# EAGLE board RaterPhonicAllTogether_production_NoGraph (EAGLE 5.10)
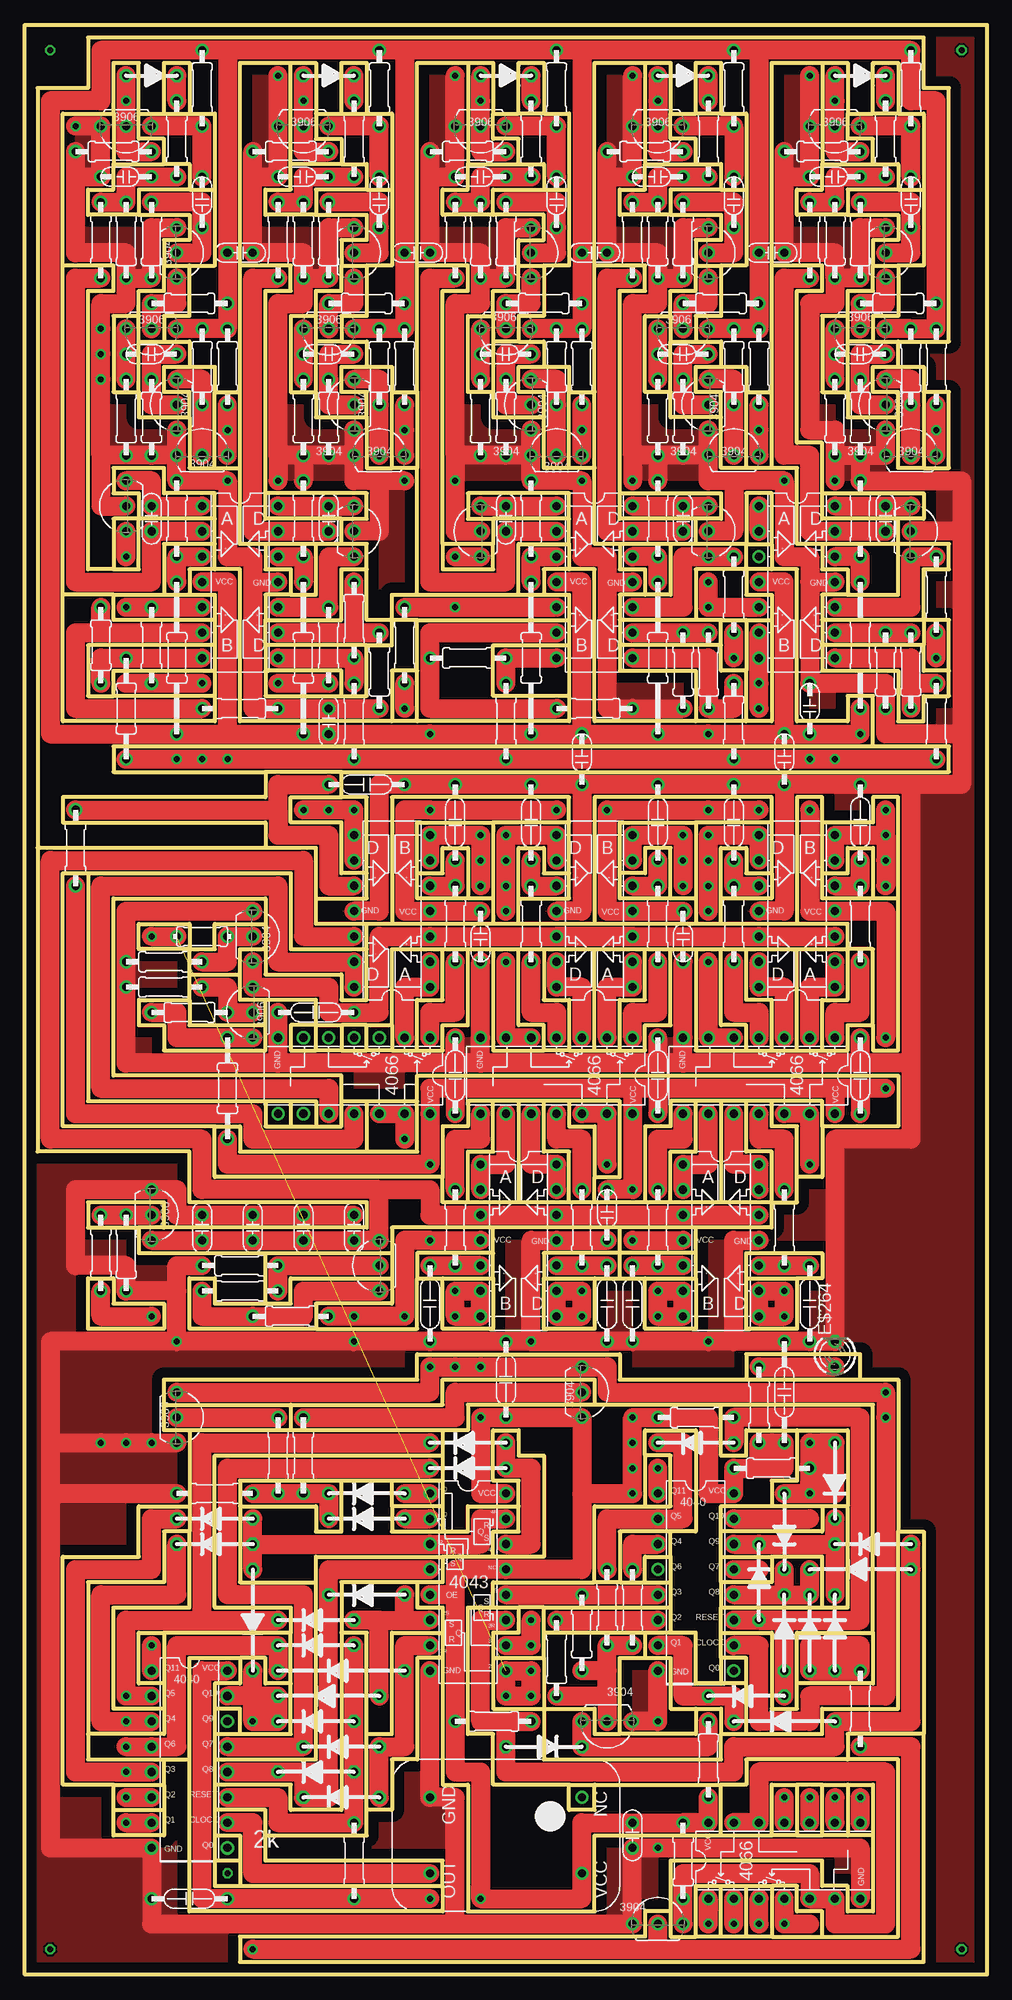
[diagram p0: board, top side]
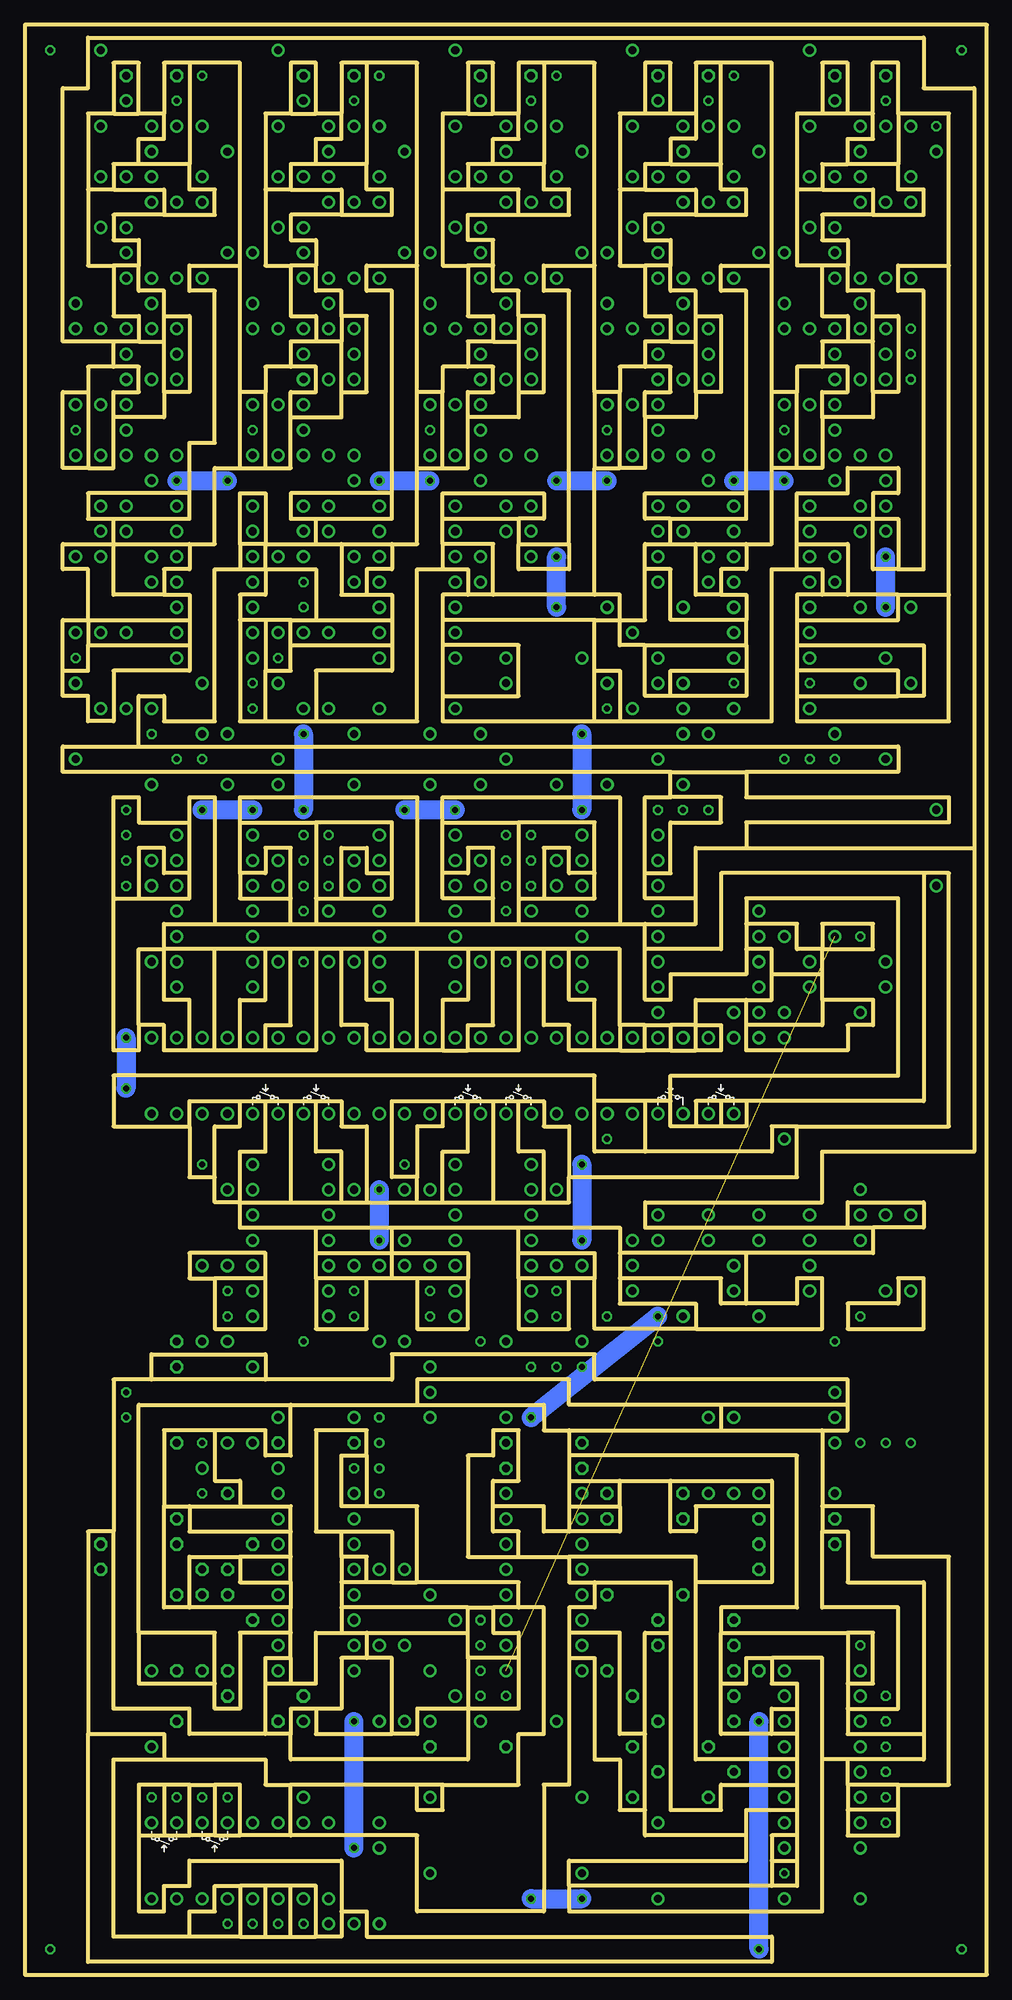
[diagram p1: board, bottom side, seen from below]

Size 96.52 x 195.58 mm. Coordinates in mm from the lower left corner, seen from the top.
Outline: 1250 segments
Copper layers (1*16): Top 0.035mm / dielectric 1.5mm / Bottom 0.035mm
Design rules "default": minimum track width 10mil, minimum drill 24mil, track to track 8mil, track to pad 8mil, pad to pad 8mil, via to via 8mil, smd to smd 8mil, copper to edge 40mil, drill to drill 8mil, minimum pad ring 10mil, minimum via ring 8mil, stop-mask expansion 4mil, vias tented up to drill 0mil, thermal gap 10mil
Milling: 1 lines

## Footprints (pad centres in the part's own frame; a part is rotated, then mirrored left to right if it is on the bottom)
4043-SR-LATCH = drill 0.813 round: 1!R -3.81,1.27; 1!S -3.81,3.81; 1Q 3.81,1.27; 2!R -3.81,-3.81; 2!S -3.81,-6.35; 2Q 3.81,-8.89; 3!R 3.81,-1.27; 3!S 3.81,-3.81; 3Q 3.81,-6.35; 4!R 3.81,3.81; 4!S 3.81,6.35; 4Q -3.81,8.89; GND -3.81,-8.89; NC -3.81,6.35; OE -3.81,-1.27; VCC 3.81,8.89
RESISTOR = drill 0.813 round: IN1 -3.81,0; IN2 3.81,0
TRANSISTOR = drill 0.8 round: P$1 0,0; P$2 2.54,0; P$3 -2.54,0
404-BIN-COUNT = drill 0.813 round: CLOCK 3.81,-7.62; GND -3.81,-10.16; Q0 3.81,-10.16; Q1 -3.81,-7.62; Q2 -3.81,-5.08; Q3 -3.81,-2.54; Q4 -3.81,2.54; Q5 -3.81,5.08; Q6 -3.81,0; Q7 3.81,0; Q8 3.81,-2.54; Q9 3.81,2.54; Q10 3.81,5.08; Q11 -3.81,7.62; RESET 3.81,-5.08; VCC 3.81,7.62
DIODE-M1 = drill 0.8 octagon: P$1 -2.54,0; P$2 2.54,0
711A-XTAL = drill 0.813 round: GND -3.81,-8.89; NC -3.81,6.35; OUT 3.81,-8.89; VCC 3.81,6.35
DIODE = drill 0.8 octagon: P$1 -3.81,0; P$2 3.81,0
SMALL-CAPACITOR = drill 0.813 round: IN1 0,0; IN2 5.08,0
LM324-QUAD-OPAMP = drill 0.813 round: AMINUS -3.81,5.08; AOUT -3.81,7.62; APLUS -3.81,2.54; BMINUS -3.81,-5.08; BOUT -3.81,-7.62; BPLUS -3.81,-2.54; CMINUS 3.81,5.08; COUT 3.81,7.62; CPLUS 3.81,2.54; DMINUS 3.81,-5.08; DOUT 3.81,-7.62; DPLUS 3.81,-2.54; GND 3.81,0; VCC -3.81,0
RESISTOR-L4 = drill 0.813 round: IN1 -7.62,0; IN2 7.62,0
CAPACITOR-S2 = drill 0.813 round: IN1 -1.27,0; IN2 1.27,0
RESISTOR-L2 = drill 0.813 round: IN1 -5.08,0; IN2 5.08,0
RESISTOR-L3 = drill 0.813 round: IN1 -6.35,0; IN2 6.35,0
4066-QUAD-SW = drill 0.813 round: A1 -3.81,7.62; A2 -3.81,2.54; A3 3.81,-5.08; A4 3.81,0; B1 -3.81,5.08; B2 -3.81,0; B3 3.81,-7.62; B4 3.81,-2.54; C1 3.81,5.08; C2 -3.81,-2.54; C3 -3.81,-5.08; C4 3.81,2.54; GND -3.81,-7.62; VCC 3.81,7.62
DIODE-L2 = drill 0.8 octagon: P$1 -5.08,0; P$2 5.08,0
CAPACITOR-L1 = drill 0.813 round: IN1 -5.08,0; IN2 5.08,0
CAPACITOR = drill 0.813 round: IN1 -2.54,0; IN2 5.08,0
DIODE-L3 = drill 0.8 octagon: P$1 -6.35,0; P$2 6.35,0
RESISTOR-S2 = drill 0.813 round: IN1 -2.54,0; IN2 2.54,0
LED3MM = drill 0.813 octagon: A -1.27,0; K 1.27,0

## Placement (x,y rotation side)
E$1  [4043-SR-LATCH]  44.45,39.37 0 top
E$2  2k  [RESISTOR]  27.94,146.05 270 top
E$3  [TRANSISTOR]  10.16,185.42 180 top
E$4  [404-BIN-COUNT]  16.51,22.86 0 top
E$5  [DIODE-M1]  12.7,190.5 0 top
E$6  [711A-XTAL]  49.53,13.97 270 top
E$7  [DIODE]  29.21,20.32 180 top
E$8  [DIODE]  29.21,33.02 180 top
E$9  910  [RESISTOR]  15.24,184.15 270 top
E$10  2.2uF  [SMALL-CAPACITOR]  12.7,180.34 180 top
E$11  [LM324-QUAD-OPAMP]  21.59,139.7 0 top
E$12  [DIODE]  31.75,17.78 180 top
E$13  [DIODE]  31.75,22.86 180 top
E$14  [DIODE]  29.21,35.56 180 top
E$15  100k  [RESISTOR]  10.16,173.99 90 top
E$16  100k  [RESISTOR]  7.62,173.99 270 top
E$17  [DIODE]  34.29,45.72 180 top
E$18  [TRANSISTOR]  27.94,185.42 180 top
E$19  [TRANSISTOR]  10.16,147.32 90 top
E$20  2k  [RESISTOR]  15.24,146.05 270 top
E$21  5K  [RESISTOR-L4]  27.94,132.08 90 top
E$22  [CAPACITOR-S2]  12.7,146.05 90 top
E$23  10k  [RESISTOR]  7.62,133.35 90 top
E$24  [DIODE]  34.29,48.26 180 top
E$25  [DIODE]  19.05,43.18 180 top
E$26  [DIODE]  19.05,45.72 180 top
E$27  [404-BIN-COUNT]  67.31,40.64 0 top
E$28  [DIODE]  76.2,34.29 90 top
E$29  1k  [RESISTOR]  21.59,127 0 top
E$30  [CAPACITOR-S2]  30.48,146.05 90 top
E$31  10K  [RESISTOR]  17.78,189.23 270 top
E$32  500Pf  [SMALL-CAPACITOR]  17.78,175.26 90 top
E$33  100K  [RESISTOR]  12.7,173.99 90 top
E$34  [TRANSISTOR]  15.24,172.72 270 top
E$35  2k  [RESISTOR]  16.51,167.64 0 top
E$36  [TRANSISTOR]  12.7,165.1 180 top
E$37  22Pf  [SMALL-CAPACITOR]  15.24,162.56 180 top
E$38  100k  [RESISTOR-L2]  10.16,127 90 top
E$39  [DIODE]  73.66,39.37 90 top
E$40  100k  [RESISTOR]  12.7,156.21 90 top
E$41  [DIODE]  72.39,27.94 180 top
E$42  [DIODE]  67.31,53.34 180 top
E$43  [TRANSISTOR]  15.24,157.48 90 top
E$44  2k  [RESISTOR]  17.78,161.29 90 top
E$45  [TRANSISTOR]  17.78,152.4 0 top
E$46  2k  [RESISTOR]  20.32,161.29 90 top
E$47  [CAPACITOR-S2]  48.26,146.05 90 top
E$48  [CAPACITOR-S2]  66.04,146.05 90 top
E$49  5K  [RESISTOR-L3]  83.82,133.35 90 top
E$50  [CAPACITOR-S2]  86.36,146.05 90 top
E$51  2K  [RESISTOR]  25.4,52.07 90 top
E$52  10k  [RESISTOR]  33.02,135.89 270 top
E$53  10k  [RESISTOR]  44.45,132.08 180 top
E$54  [TRANSISTOR]  33.02,144.78 270 top
E$55  [DIODE-M1]  30.48,190.5 0 top
E$56  910  [RESISTOR]  33.02,184.15 270 top
E$57  2.2uF  [SMALL-CAPACITOR]  30.48,180.34 180 top
E$58  100k  [RESISTOR]  27.94,173.99 90 top
E$59  100k  [RESISTOR]  25.4,173.99 270 top
E$60  10K  [RESISTOR]  35.56,189.23 270 top
E$61  500Pf  [SMALL-CAPACITOR]  35.56,175.26 90 top
E$62  100K  [RESISTOR]  30.48,173.99 90 top
E$63  [TRANSISTOR]  33.02,172.72 270 top
E$64  2k  [RESISTOR]  34.29,167.64 0 top
E$65  [TRANSISTOR]  30.48,165.1 180 top
E$66  100k  [RESISTOR]  30.48,156.21 90 top
E$67  [TRANSISTOR]  33.02,157.48 90 top
E$68  2k  [RESISTOR]  35.56,161.29 90 top
E$69  [TRANSISTOR]  35.56,152.4 0 top
E$70  2k  [RESISTOR]  38.1,161.29 90 top
E$71  2k  [RESISTOR]  27.94,156.21 270 top
E$72  22Pf  [SMALL-CAPACITOR]  33.02,162.56 180 top
E$73  [LM324-QUAD-OPAMP]  57.15,139.7 0 top
E$74  [TRANSISTOR]  45.72,185.42 180 top
E$75  2k  [RESISTOR]  10.16,156.21 270 top
E$76  4k  [RESISTOR]  8.89,182.88 0 top
E$77  [DIODE-M1]  48.26,190.5 0 top
E$78  910  [RESISTOR]  50.8,184.15 270 top
E$79  2.2uF  [SMALL-CAPACITOR]  48.26,180.34 180 top
E$80  100k  [RESISTOR]  45.72,173.99 90 top
E$81  100k  [RESISTOR]  43.18,173.99 270 top
E$82  2k  [RESISTOR]  50.8,146.05 90 top
E$83  5K  [RESISTOR-L4]  50.8,132.08 90 top
E$84  5K  [RESISTOR-L4]  63.5,132.08 90 top
E$85  5K  [RESISTOR-L4]  15.24,132.08 90 top
E$86  [TRANSISTOR]  45.72,144.78 90 top
E$87  [TRANSISTOR]  68.58,144.78 270 top
E$88  [TRANSISTOR]  88.9,144.78 270 top
E$89  10K  [RESISTOR]  53.34,189.23 270 top
E$90  500Pf  [SMALL-CAPACITOR]  53.34,175.26 90 top
E$91  100K  [RESISTOR]  48.26,173.99 90 top
E$92  [TRANSISTOR]  50.8,172.72 270 top
E$93  2k  [RESISTOR]  52.07,167.64 0 top
E$94  [TRANSISTOR]  48.26,165.1 180 top
E$95  100k  [RESISTOR]  48.26,156.21 90 top
E$96  [TRANSISTOR]  50.8,157.48 90 top
E$97  2k  [RESISTOR]  53.34,161.29 90 top
E$98  [TRANSISTOR]  53.34,152.4 0 top
E$99  2k  [RESISTOR]  55.88,161.29 90 top
E$100  1k  [RESISTOR]  57.15,127 0 top
E$101  4k  [RESISTOR]  30.48,133.35 270 top
E$102  2k  [RESISTOR]  63.5,146.05 90 top
E$103  [SMALL-CAPACITOR]  78.74,124.46 90 top
E$104  4k  [RESISTOR]  12.7,133.35 270 top
E$105  1k  [RESISTOR]  35.56,130.81 90 top
E$106  4k  [RESISTOR]  38.1,133.35 270 top
E$107  1k  [RESISTOR]  66.04,130.81 90 top
E$108  2k  [RESISTOR]  45.72,156.21 270 top
E$109  22Pf  [SMALL-CAPACITOR]  50.8,162.56 180 top
E$110  [TRANSISTOR]  63.5,185.42 180 top
E$111  4k  [RESISTOR]  26.67,182.88 0 top
E$112  [DIODE-M1]  66.04,190.5 0 top
E$113  910  [RESISTOR]  68.58,184.15 270 top
E$114  2.2uF  [SMALL-CAPACITOR]  66.04,180.34 180 top
E$115  100k  [RESISTOR]  63.5,173.99 90 top
E$116  100k  [RESISTOR]  60.96,173.99 270 top
E$117  10K  [RESISTOR]  71.12,189.23 270 top
E$118  500Pf  [SMALL-CAPACITOR]  71.12,175.26 90 top
E$119  100K  [RESISTOR]  66.04,173.99 90 top
E$120  [TRANSISTOR]  68.58,172.72 270 top
E$121  2k  [RESISTOR]  69.85,167.64 0 top
E$122  [TRANSISTOR]  66.04,165.1 180 top
E$123  100k  [RESISTOR]  66.04,156.21 90 top
E$124  [TRANSISTOR]  68.58,157.48 90 top
E$125  2k  [RESISTOR]  71.12,161.29 90 top
E$126  [TRANSISTOR]  71.12,152.4 0 top
E$127  2k  [RESISTOR]  73.66,161.29 90 top
E$128  2k  [RESISTOR]  63.5,156.21 270 top
E$129  22Pf  [SMALL-CAPACITOR]  68.58,162.56 180 top
E$130  2K  [RESISTOR]  27.94,52.07 90 top
E$131  [DIODE]  78.74,34.29 90 top
E$132  [4066-QUAD-SW]  76.2,11.43 90 top
E$133  [DIODE-L2]  83.82,40.64 180 top
E$134  [DIODE]  81.28,34.29 90 top
E$135  [TRANSISTOR]  63.5,5.08 0 top
E$136  [DIODE]  76.2,44.45 270 top
E$137  [DIODE]  81.28,49.53 270 top
E$138  2K  [RESISTOR]  74.93,50.8 180 top
E$139  2K  [RESISTOR]  83.82,26.67 270 top
E$140  1UF  [CAPACITOR-L1]  76.2,58.42 90 top
E$141  1UF  [CAPACITOR]  15.24,7.62 0 top
E$142  [DIODE]  85.09,43.18 180 top
E$143  [DIODE]  44.45,50.8 180 top
E$144  [DIODE]  44.45,53.34 180 top
E$145  10K  [RESISTOR]  67.31,55.88 0 top
E$146  [TRANSISTOR]  55.88,58.42 270 top
E$147  [TRANSISTOR]  15.24,55.88 270 top
E$148  10K  [RESISTOR]  19.05,48.26 180 top
E$149  [DIODE-L3]  31.75,30.48 180 top
E$150  [DIODE-L2]  30.48,27.94 180 top
E$151  [DIODE]  29.21,25.4 180 top
E$152  [DIODE]  34.29,38.1 180 top
E$153  [DIODE-L2]  22.86,35.56 270 top
E$154  [DIODE-L2]  76.2,25.4 180 top
E$155  [TRANSISTOR]  58.42,25.4 180 top
E$156  [LM324-QUAD-OPAMP]  77.47,139.7 0 top
E$157  10k  [RESISTOR]  68.58,130.81 90 top
E$158  4k  [RESISTOR]  71.12,138.43 270 top
E$159  2k  [RESISTOR]  83.82,146.05 90 top
E$160  10k  [RESISTOR]  88.9,130.81 90 top
E$161  1k  [RESISTOR]  86.36,130.81 90 top
E$162  4k  [RESISTOR]  91.44,138.43 270 top
E$163  2K  [RESISTOR]  33.02,11.43 270 top
E$164  2K  [RESISTOR]  66.04,11.43 270 top
E$165  2K  [RESISTOR]  68.58,21.59 270 top
E$166  [CAPACITOR-S2]  30.48,125.73 90 top
E$167  [TRANSISTOR]  81.28,185.42 180 top
E$168  4k  [RESISTOR]  44.45,182.88 0 top
E$169  [DIODE-M1]  83.82,190.5 0 top
E$170  910  [RESISTOR]  86.36,184.15 270 top
E$171  2.2uF  [SMALL-CAPACITOR]  83.82,180.34 180 top
E$172  100k  [RESISTOR]  81.28,173.99 90 top
E$173  100k  [RESISTOR]  78.74,173.99 270 top
E$174  10K  [RESISTOR]  88.9,189.23 270 top
E$175  500Pf  [SMALL-CAPACITOR]  88.9,175.26 90 top
E$176  100K  [RESISTOR]  83.82,173.99 90 top
E$177  [TRANSISTOR]  86.36,172.72 270 top
E$178  2k  [RESISTOR]  87.63,167.64 0 top
E$179  [TRANSISTOR]  83.82,165.1 180 top
E$180  100k  [RESISTOR]  83.82,156.21 90 top
E$181  [TRANSISTOR]  86.36,157.48 90 top
E$182  2k  [RESISTOR]  88.9,161.29 90 top
E$183  [TRANSISTOR]  88.9,152.4 0 top
E$184  2k  [RESISTOR]  91.44,161.29 90 top
E$185  2k  [RESISTOR]  81.28,156.21 270 top
E$186  22Pf  [SMALL-CAPACITOR]  86.36,162.56 180 top
E$187  [CAPACITOR-S2]  74.93,172.72 180 top
E$188  [CAPACITOR-S2]  57.15,172.72 180 top
E$189  [CAPACITOR-S2]  39.37,172.72 180 top
E$190  [CAPACITOR-S2]  21.59,172.72 180 top
E$191  4k  [RESISTOR]  62.23,182.88 0 top
E$192  [CAPACITOR-S2]  27.94,74.93 90 top
E$193  [DIODE]  52.07,22.86 0 top
E$194  2K  [RESISTOR]  55.88,34.29 270 top
E$195  2K  [RESISTOR]  53.34,31.75 270 top
E$196  2K  [RESISTOR]  60.96,36.83 270 top
E$197  2K  [RESISTOR]  58.42,36.83 270 top
E$198  10K  [RESISTOR]  46.99,25.4 0 top
E$199  [4066-QUAD-SW]  33.02,90.17 270 top
E$200  150  [RESISTOR]  5.08,113.03 270 top
E$201  [LM324-QUAD-OPAMP]  36.83,106.68 180 top
E$202  150  [RESISTOR]  43.18,105.41 270 top
E$203  [CAPACITOR]  43.18,114.3 90 top
E$204  [4066-QUAD-SW]  53.34,90.17 270 top
E$205  [LM324-QUAD-OPAMP]  49.53,73.66 0 top
E$206  150  [RESISTOR]  55.88,74.93 90 top
E$207  150  [RESISTOR]  43.18,74.93 90 top
E$208  [CAPACITOR]  58.42,68.58 270 top
E$209  [CAPACITOR]  40.64,68.58 270 top
E$210  [LM324-QUAD-OPAMP]  57.15,106.68 180 top
E$211  150  [RESISTOR]  50.8,105.41 270 top
E$212  150  [RESISTOR]  63.5,105.41 270 top
E$213  [CAPACITOR]  50.8,114.3 90 top
E$214  [CAPACITOR]  63.5,114.3 90 top
E$215  [4066-QUAD-SW]  73.66,90.17 270 top
E$216  [LM324-QUAD-OPAMP]  69.85,73.66 0 top
E$217  150  [RESISTOR]  76.2,74.93 90 top
E$218  150  [RESISTOR]  63.5,74.93 90 top
E$219  [CAPACITOR]  78.74,68.58 270 top
E$220  [CAPACITOR]  60.96,68.58 270 top
E$221  [LM324-QUAD-OPAMP]  77.47,106.68 180 top
E$222  150  [RESISTOR]  71.12,105.41 270 top
E$223  150  [RESISTOR]  83.82,105.41 270 top
E$224  [CAPACITOR]  71.12,114.3 90 top
E$225  [CAPACITOR]  83.82,114.3 90 top
E$226  [CAPACITOR]  63.5,88.9 90 top
E$227  [CAPACITOR]  43.18,88.9 90 top
E$228  [CAPACITOR]  83.82,88.9 90 top
E$229  [SMALL-CAPACITOR]  58.42,73.66 90 top
E$230  [SMALL-CAPACITOR]  45.72,106.68 270 top
E$231  [SMALL-CAPACITOR]  66.04,106.68 270 top
E$232  [CAPACITOR]  35.56,119.38 180 top
E$233  [TRANSISTOR]  35.56,71.12 90 top
E$234  [TRANSISTOR]  12.7,76.2 270 top
E$235  2k  [RESISTOR]  21.59,68.58 180 top
E$236  10k  [RESISTOR]  21.59,71.12 180 top
E$237  2k  [RESISTOR]  26.67,66.04 0 top
E$238  10k  [RESISTOR]  7.62,72.39 270 top
E$239  10k  [RESISTOR]  10.16,72.39 270 top
E$240  [TRANSISTOR]  22.86,96.52 90 top
E$241  [TRANSISTOR]  22.86,104.14 270 top
E$242  2k  [RESISTOR]  16.51,96.52 180 top
E$243  10k  [RESISTOR]  13.97,99.06 180 top
E$244  [CAPACITOR]  27.94,96.52 0 top
E$245  10k  [RESISTOR-S2]  17.78,104.14 180 top
E$246  10k  [RESISTOR]  13.97,101.6 180 top
E$247  [CAPACITOR-S2]  33.02,74.93 90 top
E$248  2k  [RESISTOR-L2]  20.32,88.9 270 top
E$249  100k  [RESISTOR]  33.02,125.73 90 top
E$250  100k  [RESISTOR]  48.26,125.73 90 top
E$251  100k  [RESISTOR]  71.12,125.73 90 top
E$252  100k  [RESISTOR]  91.44,125.73 90 top
E$263  100  [RESISTOR]  73.66,57.15 90 top
E$264  [LED3MM]  81.28,62.23 90 top
E$266  [CAPACITOR-S2]  60.96,13.97 90 top
E$267  [CAPACITOR]  48.26,58.42 90 top
E$269  [SMALL-CAPACITOR]  55.88,119.38 90 top
E$270  [SMALL-CAPACITOR]  76.2,119.38 90 top
E$318  4k  [RESISTOR]  80.01,182.88 0 top
E$379  [CAPACITOR-S2]  22.86,74.93 90 top
E$380  [CAPACITOR-S2]  17.78,74.93 90 top

## Library data of the parts
E$1-E$252 E$263 E$266 E$267 E$269 E$270 E$318 E$379 E$380 = RussellLibrary
E$264 = led

## Nets
GND: E$1.GND E$2.IN1 E$3.P$2 E$4.GND E$6.GND E$10.IN2 E$11.GND E$15.IN1 E$18.P$2 E$19.P$1 E$27.GND E$29.IN2 E$33.IN1 E$34.P$3 E$40.IN1 E$43.P$3 E$45.P$3 E$54.P$1 E$57.IN2 E$58.IN1 E$62.IN1 E$63.P$3 E$66.IN1 E$67.P$3 E$69.P$3 E$73.GND E$74.P$2 E$79.IN2 E$80.IN1 E$87.P$1 E$88.P$1 E$91.IN1 E$92.P$3 E$95.IN1 E$96.P$3 E$98.P$3 E$100.IN2 E$102.IN2 E$105.IN1 E$107.IN1 E$110.P$2 E$114.IN2 E$115.IN1 E$119.IN1 E$120.P$3 E$123.IN1 E$124.P$3 E$126.P$3 E$132.GND E$135.P$3 E$148.IN2 E$155.P$3 E$156.GND E$159.IN2 E$161.IN1 E$167.P$2 E$171.IN2 E$172.IN1 E$176.IN1 E$177.P$3 E$180.IN1 E$181.P$3 E$183.P$3 E$199.GND E$201.GND E$203.IN2 E$204.GND E$205.GND E$208.IN2 E$209.IN2 E$210.GND E$213.IN2 E$214.IN2 E$215.GND E$216.GND E$219.IN2 E$220.IN2 E$221.GND E$224.IN2 E$225.IN2 E$226.IN2 E$227.IN2 E$228.IN2 E$229.IN1 E$230.IN2 E$231.IN2 E$232.IN1 E$234.P$3 E$236.IN2 E$239.IN2 E$241.P$3 E$243.IN2 E$244.IN1 E$246.IN2
S$1: E$3.P$1 E$5.P$1 E$76.IN2
S$2: E$5.P$2 E$9.IN1
S$3: E$4.CLOCK E$6.OUT
S$4: E$9.IN2 E$10.IN1 E$15.IN2 E$16.IN1
S$5: E$11.AMINUS E$16.IN2
S$6: E$32.IN1 E$33.IN2 E$34.P$1
S$7: E$11.APLUS E$85.IN2
S$8: E$11.BMINUS E$23.IN2 E$29.IN1
S$9: E$18.P$1 E$55.P$1 E$111.IN2
S$10: E$11.BOUT E$23.IN1
S$11: E$11.AOUT
S$12: E$104.IN2
S$13: E$73.CPLUS E$84.IN2 E$102.IN1
S$14: E$3.P$3 E$31.IN2 E$32.IN2
S$15: E$59.IN2
S$17: E$34.P$2 E$35.IN1 E$36.P$1
S$18: E$11.DOUT E$52.IN2
S$19: E$36.P$2 E$75.IN1
S$20: E$37.IN1 E$40.IN2 E$43.P$1
S$21: E$4.RESET E$7.P$1 E$8.P$1 E$151.P$1
S$22: E$11.DMINUS E$52.IN1 E$105.IN2
S$23: E$43.P$2 E$44.IN1 E$45.P$1
S$24: E$45.P$2 E$46.IN1
S$25: E$1.2!S E$12.P$1 E$13.P$1
S$26: E$49.IN2 E$156.CPLUS E$159.IN1
S$27: E$50.IN1 E$156.CMINUS E$173.IN2
S$28: E$55.P$2 E$56.IN1
S$29: E$74.P$1 E$77.P$1 E$168.IN2
S$30: E$1.2!R E$14.P$1 E$152.P$1
S$31: E$18.P$3 E$60.IN2 E$61.IN2
S$32: E$61.IN1 E$62.IN2 E$63.P$1
S$33: E$63.P$2 E$64.IN1 E$65.P$1
S$34: E$66.IN2 E$67.P$1 E$72.IN1
S$35: E$67.P$2 E$68.IN1 E$69.P$1
S$36: E$69.P$2 E$70.IN1
S$37: E$65.P$2 E$71.IN1
S$38: E$56.IN2 E$57.IN1 E$58.IN2 E$59.IN1
S$39: E$77.P$2 E$78.IN1
S$40: E$73.AMINUS E$81.IN2
S$41: E$11.CPLUS E$21.IN2
S$42: E$73.AOUT
S$43: E$53.IN1 E$73.BOUT
S$44: E$53.IN2 E$73.BMINUS E$100.IN1
S$45: E$73.APLUS E$83.IN2
S$46: E$11.DPLUS E$54.P$2
S$47: E$74.P$3 E$89.IN2 E$90.IN2
S$48: E$90.IN1 E$91.IN2 E$92.P$1
S$49: E$92.P$2 E$93.IN1 E$94.P$1
S$50: E$95.IN2 E$96.P$1 E$109.IN1
S$51: E$96.P$2 E$97.IN1 E$98.P$1
S$52: E$98.P$2 E$99.IN1
S$53: E$94.P$2 E$108.IN1
S$54: E$78.IN2 E$79.IN1 E$80.IN2 E$81.IN1
S$55: E$87.P$3
S$56: E$11.BPLUS E$19.P$3
S$57: E$73.BPLUS E$86.P$3 E$106.IN1
S$58: E$101.IN2
S$59: E$73.DPLUS E$87.P$2 E$158.IN1
S$60: E$116.IN2
S$61: E$106.IN2
S$62: E$110.P$1 E$112.P$1 E$191.IN2
S$63: E$112.P$2 E$113.IN1
S$64: E$110.P$3 E$117.IN2 E$118.IN2
S$65: E$118.IN1 E$119.IN2 E$120.P$1
S$66: E$120.P$2 E$121.IN1 E$122.P$1
S$67: E$123.IN2 E$124.P$1 E$129.IN1
S$68: E$124.P$2 E$125.IN1 E$126.P$1
S$69: E$126.P$2 E$127.IN1
S$70: E$122.P$2 E$128.IN1
S$71: E$113.IN2 E$114.IN1 E$115.IN2 E$116.IN1
S$72: E$1.4!R E$143.P$1 E$144.P$1
S$73: E$1.4Q E$24.P$1
S$74: E$1.NC E$17.P$1
S$75: E$4.Q3 E$26.P$2
S$76: E$27.Q9 E$39.P$2 E$134.P$2 E$137.P$2
S$77: E$27.Q8 E$28.P$2 E$131.P$2 E$136.P$2
S$78: E$27.RESET E$28.P$1 E$39.P$1 E$41.P$1 E$42.P$1 E$145.IN2
S$79: E$1.3!R
S$80: E$17.P$2 E$24.P$2 E$51.IN1 E$130.IN1 E$148.IN1
S$81: E$27.CLOCK
S$82: E$51.IN2
S$83: E$130.IN2
S$84: E$131.P$1 E$134.P$1 E$139.IN1
S$85: E$136.P$1 E$137.P$1 E$138.IN1
S$86: E$132.C1 E$132.C2 E$132.C3 E$132.C4 E$135.P$2
S$87: E$4.Q10 E$135.P$1 E$139.IN2 E$150.P$2 E$151.P$2 E$153.P$2
S$88: E$4.Q11
S$90: E$88.P$2 E$156.DPLUS E$162.IN1
S$91: E$73.DMINUS E$107.IN2 E$157.IN2
S$92: E$73.DOUT E$157.IN1 E$251.IN2
S$94: E$156.AMINUS E$156.AOUT
S$95: E$156.BMINUS E$156.BOUT
S$96: E$167.P$1 E$169.P$1 E$318.IN2
S$97: E$169.P$2 E$170.IN1
S$98: E$167.P$3 E$174.IN2 E$175.IN2
S$99: E$175.IN1 E$176.IN2 E$177.P$1
S$100: E$177.P$2 E$178.IN1 E$179.P$1
S$101: E$180.IN2 E$181.P$1 E$186.IN1
S$102: E$181.P$2 E$182.IN1 E$183.P$1
S$103: E$183.P$2 E$184.IN1
S$104: E$179.P$2 E$185.IN1
S$105: E$170.IN2 E$171.IN1 E$172.IN2 E$173.IN1
S$106: E$27.Q10
S$107: E$156.DMINUS E$160.IN2 E$161.IN2
S$108: E$156.DOUT E$160.IN1 E$252.IN2
S$109: E$27.Q7
S$110: E$132.A1
S$111: E$132.A3
S$112: E$132.B3
S$113: E$132.B1
S$114: E$132.A2
S$115: E$132.B2
S$117: E$4.Q6 E$8.P$2
S$118: E$4.Q7 E$13.P$2 E$143.P$2
S$119: E$4.Q5 E$14.P$2 E$144.P$2
S$120: E$4.Q4 E$25.P$2
S$121: E$1.1!R E$4.Q8 E$7.P$2 E$12.P$2
S$122: E$27.Q1 E$41.P$2 E$154.P$2
S$123: E$155.P$2 E$165.IN1
S$124: E$1.1!S E$1.4!S E$26.P$1
S$125: E$27.Q2 E$195.IN1
S$126: E$27.Q5 E$42.P$2 E$197.IN1
S$127: E$27.Q4 E$196.IN1
S$128: E$155.P$1 E$194.IN2 E$195.IN2 E$196.IN2 E$197.IN2
S$129: E$199.C1 E$199.C4
S$130: E$156.APLUS
S$134: E$1.3!S E$133.P$1 E$142.P$1 E$154.P$1 E$193.P$1 E$198.IN2
S$135: E$199.A4 E$200.IN2
S$136: E$201.AMINUS E$201.AOUT
S$137: E$202.IN2
S$138: E$201.BPLUS E$203.IN1
S$139: E$201.BMINUS E$201.BOUT
S$140: E$204.C2 E$204.C3
S$141: E$204.C1 E$204.C4
S$142: E$204.A3 E$205.AMINUS E$205.AOUT
S$143: E$204.B4 E$205.CMINUS E$205.COUT
S$144: E$204.B3 E$207.IN2
S$145: E$204.A4 E$206.IN2
S$146: E$205.DPLUS E$206.IN1 E$208.IN1
S$147: E$205.BPLUS E$209.IN1
S$148: E$210.AMINUS E$210.AOUT
S$149: E$210.CMINUS E$210.COUT
S$150: E$212.IN2
S$151: E$211.IN2
S$152: E$210.DPLUS E$211.IN1 E$213.IN1
S$153: E$210.DMINUS E$210.DOUT
S$154: E$210.BPLUS E$214.IN1
S$155: E$210.BMINUS E$210.BOUT
S$156: E$215.C2 E$215.C3
S$157: E$215.C1 E$215.C4
S$158: E$215.A3 E$216.AMINUS E$216.AOUT
S$159: E$215.B4 E$216.CMINUS E$216.COUT
S$160: E$215.B3 E$218.IN2
S$161: E$215.A4 E$217.IN2
S$162: E$216.DPLUS E$217.IN1 E$219.IN1
S$163: E$216.BPLUS E$220.IN1
S$164: E$221.AMINUS E$221.AOUT
S$165: E$221.CMINUS E$221.COUT
S$166: E$223.IN2
S$167: E$222.IN2
S$168: E$221.DPLUS E$222.IN1 E$224.IN1
S$169: E$221.DMINUS E$221.DOUT
S$170: E$221.BPLUS E$225.IN1
S$171: E$221.BMINUS E$221.BOUT
S$172: E$205.BMINUS E$205.BOUT
S$173: E$216.BMINUS E$216.BOUT
S$174: E$205.DMINUS E$205.DOUT
S$175: E$216.DMINUS E$216.DOUT
S$176: E$201.DMINUS E$201.DOUT
S$177: E$200.IN1 E$201.DPLUS E$232.IN2
S$178: E$199.B4 E$201.CMINUS E$201.COUT
S$179: E$233.P$1 E$235.IN1 E$236.IN1
S$180: E$201.CPLUS E$205.APLUS E$205.CPLUS E$216.APLUS E$216.CPLUS E$233.P$2 E$234.P$2
S$181: E$234.P$1 E$238.IN1 E$239.IN1
S$182: E$233.P$3 E$235.IN2 E$237.IN1
S$183: E$1.2Q E$245.IN2
S$185: E$240.P$1 E$242.IN1 E$243.IN1
S$186: E$201.APLUS E$210.APLUS E$210.CPLUS E$221.APLUS E$221.CPLUS E$240.P$2 E$241.P$2
S$187: E$241.P$1 E$245.IN1 E$246.IN1
S$188: E$240.P$3 E$242.IN2
S$189: E$1.3Q
S$190: E$132.B4
S$191: E$132.A4
S$192: E$38.IN1 E$249.IN1 E$250.IN1 E$251.IN1 E$252.IN1
S$193: E$158.IN2
S$194: E$156.BPLUS
S$195: E$263.IN2
S$203: E$4.Q2
S$204: E$4.Q1
S$205: E$27.Q11
S$207: E$238.IN2
VCC: E$1.1Q E$1.OE E$1.VCC E$4.VCC E$6.VCC E$11.VCC E$21.IN1 E$27.VCC E$31.IN1 E$35.IN2 E$36.P$3 E$44.IN2 E$46.IN2 E$49.IN1 E$60.IN1 E$64.IN2 E$65.P$3 E$68.IN2 E$70.IN2 E$73.VCC E$83.IN1 E$84.IN1 E$85.IN1 E$89.IN1 E$93.IN2 E$94.P$3 E$97.IN2 E$99.IN2 E$117.IN1 E$121.IN2 E$122.P$3 E$125.IN2 E$127.IN2 E$132.VCC E$138.IN2 E$140.IN1 E$156.VCC E$165.IN2 E$174.IN1 E$178.IN2 E$179.P$3 E$182.IN2 E$184.IN2 E$199.VCC E$201.VCC E$204.VCC E$205.VCC E$210.VCC E$215.VCC E$216.VCC E$221.VCC E$226.IN1 E$227.IN1 E$228.IN1 E$229.IN2 E$230.IN1 E$231.IN1 E$237.IN2 E$263.IN1

## Tracks (layer width: path | path; a pad name or v marks a point on that pad's centre or on a via)
GND  (via drill 0.6)
  Top 1.93: 33.02,76.2 15.24,76.2 15.24,78.74 E$234.P$3 5.08,78.74 5.08,71.12 10.16,71.12 E$239.IN2 15.24,68.58 | E$236.IN2 15.24,71.12 15.24,68.58 | E$241.P$3 10.16,106.68 E$246.IN2 E$243.IN2 10.16,91.44 25.4,91.44 | E$229.IN1 E$205.GND 50.8,73.66 v50.8,63.5 | E$201.GND 35.56,106.68 35.56,119.38 E$232.IN1 E$203.IN2 E$213.IN2 55.88,119.38 | v15.24,63.5 15.24,68.58 | v50.8,63.5 E$209.IN2 v33.02,63.5 | v50.8,63.5 E$208.IN2 E$220.IN2 | E$244.IN1 E$199.GND 25.4,91.44 | E$220.IN2 v33.02,63.5 | E$216.GND 71.12,73.66 71.12,63.5 | E$210.GND 55.88,106.68 55.88,119.38 | 71.12,63.5 v68.58,63.5 | v68.58,63.5 E$220.IN2 | 43.18,91.44 25.4,91.44 | 43.18,91.44 E$227.IN2 | E$230.IN2 E$204.GND 45.72,91.44 | v5.08,185.42 E$3.P$2 E$10.IN2 5.08,180.34 | 45.72,91.44 43.18,91.44 | E$219.IN2 71.12,63.5 | 55.88,119.38 E$214.IN2 E$224.IN2 76.2,119.38 | E$219.IN2 81.28,63.5 81.28,83.82 88.9,83.82 88.9,91.44 | 63.5,91.44 45.72,91.44 | 63.5,91.44 E$226.IN2 | E$231.IN2 E$215.GND 66.04,91.44 | 5.08,180.34 5.08,182.88 | 66.04,91.44 63.5,91.44 | E$221.GND 76.2,106.68 76.2,119.38 | v78.74,190.5 E$167.P$2 E$171.IN2 76.2,180.34 | 83.82,91.44 E$228.IN2 | 83.82,91.44 66.04,91.44 | 5.08,180.34 5.08,172.72 10.16,172.72 E$15.IN1 | E$34.P$3 12.7,175.26 E$33.IN1 E$15.IN1 | 88.9,91.44 83.82,91.44 | 76.2,119.38 E$225.IN2 88.9,119.38 | 76.2,180.34 76.2,182.88 | E$177.P$3 83.82,175.26 E$176.IN1 E$172.IN1 | 76.2,180.34 76.2,172.72 81.28,172.72 E$172.IN1 | 88.9,119.38 88.9,91.44 | E$15.IN1 10.16,167.64 7.62,167.64 v7.62,165.1 v7.62,162.56 v7.62,160.02 7.62,152.4 | 88.9,119.38 93.98,119.38 93.98,124.46 | 93.98,124.46 86.36,124.46 E$161.IN1 86.36,129.54 78.74,129.54 78.74,139.7
  Top 1.93: 93.98,144.78 93.98,124.46 | 93.98,144.78 E$88.P$1 | E$172.IN1 81.28,167.64 78.74,167.64 78.74,154.94 81.28,154.94 81.28,152.4 | 93.98,144.78 93.98,149.86 E$159.IN2 E$180.IN1 | v25.4,190.5 E$18.P$2 E$57.IN2 22.86,180.34 | E$105.IN1 E$29.IN2 22.86,127 22.86,139.7 | E$19.P$1 7.62,147.32 7.62,152.4 | E$181.P$3 E$183.P$3 E$180.IN1 | v60.96,190.5 E$110.P$2 E$114.IN2 58.42,180.34 | 78.74,139.7 E$156.GND | 22.86,180.34 22.86,182.88 | 22.86,139.7 E$11.GND | 7.62,152.4 E$40.IN1 E$45.P$3 | 22.86,180.34 22.86,172.72 27.94,172.72 E$58.IN1 | E$63.P$3 30.48,175.26 E$62.IN1 E$58.IN1 | 78.74,139.7 78.74,142.24 76.2,142.24 v76.2,149.86 71.12,149.86 | 81.28,152.4 E$180.IN1 | 58.42,180.34 58.42,182.88 | 81.28,152.4 v81.28,149.86 | E$45.P$3 E$43.P$3 | 22.86,139.7 22.86,142.24 20.32,142.24 v20.32,149.86 15.24,149.86 E$45.P$3 | E$87.P$1 71.12,144.78 71.12,149.86 | 58.42,180.34 58.42,172.72 63.5,172.72 E$115.IN1 | E$120.P$3 66.04,175.26 E$119.IN1 E$115.IN1 | E$58.IN1 27.94,167.64 25.4,167.64 25.4,152.4 | 71.12,149.86 68.58,149.86 E$126.P$3 | E$102.IN2 63.5,152.4 E$126.P$3 | E$107.IN1 E$100.IN2 58.42,127 58.42,139.7 | E$115.IN1 63.5,167.64 60.96,167.64 60.96,152.4 | E$126.P$3 E$124.P$3 | 25.4,152.4 v25.4,149.86 | 27.94,152.4 E$2.IN1 | 27.94,152.4 25.4,152.4 | E$126.P$3 E$123.IN1 60.96,152.4 | 58.42,139.7 E$73.GND | 58.42,139.7 58.42,142.24 55.88,142.24 v55.88,149.86 50.8,149.86 E$98.P$3 | 27.94,152.4 E$66.IN1 E$69.P$3 | E$69.P$3 E$67.P$3 | 60.96,152.4 v60.96,149.86 | E$69.P$3 33.02,149.86 35.56,149.86 | E$54.P$1 35.56,144.78 35.56,149.86 | E$98.P$3 E$96.P$3 | v38.1,149.86 35.56,149.86 | 45.72,144.78 43.18,144.78 v43.18,149.86 43.18,152.4
  Top 1.93: E$98.P$3 E$95.IN1 43.18,152.4 | E$92.P$3 48.26,175.26 E$91.IN1 E$80.IN1 | 43.18,152.4 43.18,167.64 45.72,167.64 E$80.IN1 | E$80.IN1 45.72,172.72 40.64,172.72 40.64,180.34 | 40.64,180.34 40.64,182.88 | 40.64,180.34 E$79.IN2 E$74.P$2 v43.18,190.5 | E$219.IN2 v68.58,63.5 | E$155.P$3 v63.5,25.4 E$27.GND | E$132.GND 83.82,12.7 v63.5,12.7 60.96,12.7 E$135.P$3 43.18,5.08 | v68.58,63.5 v50.8,63.5 | v50.8,63.5 v33.02,63.5 | E$1.GND E$6.GND 43.18,17.78 43.18,5.08 | v12.7,53.34 15.24,53.34 | v12.7,53.34 v10.16,53.34 v7.62,53.34 | v33.02,63.5 v15.24,63.5 | v15.24,63.5 2.54,63.5 2.54,53.34 | v7.62,53.34 v12.7,53.34 | 43.18,5.08 12.7,5.08 E$4.GND 2.54,12.7 2.54,48.26 | 2.54,53.34 v7.62,53.34 | 2.54,48.26 E$148.IN2 | 2.54,53.34 2.54,48.26
  Bottom 1.93: v81.28,149.86 v76.2,149.86 | v25.4,149.86 v20.32,149.86 | v60.96,149.86 v55.88,149.86 | v43.18,149.86 v38.1,149.86 | v63.5,12.7 v63.5,25.4
  pour Top: -2.54,198.12 99.06,198.12 99.06,-2.54 -2.54,-2.54
S$1  (via drill 0.6)
  Top 1.93: E$5.P$1 v10.16,187.96 E$3.P$1 10.16,182.88 E$76.IN2
S$2
  Top 1.93: E$9.IN1 E$5.P$2
S$3
  Top 1.93: E$4.CLOCK 22.86,15.24 22.86,10.16 E$6.OUT
S$4
  Top 1.93: E$9.IN2 E$10.IN1 10.16,180.34 E$15.IN2 E$16.IN1
S$5
  Top 1.93: E$16.IN2 5.08,170.18 5.08,139.7 12.7,139.7 12.7,144.78 E$11.AMINUS
S$6
  Top 1.93: E$33.IN2 17.78,177.8 E$32.IN1 17.78,172.72 E$34.P$1
S$7
  Top 1.93: E$85.IN2 15.24,142.24 E$11.APLUS
S$8
  Top 1.93: 7.62,134.62 E$23.IN2 | 7.62,134.62 E$11.BMINUS | 7.62,134.62 5.08,134.62 5.08,127 E$29.IN1
S$9  (via drill 0.6)
  Top 1.93: E$55.P$1 v27.94,187.96 E$18.P$1 27.94,182.88 E$111.IN2
S$10
  Top 1.93: E$23.IN1 7.62,132.08 E$11.BOUT
S$11
  Top 1.93: 10.16,149.86 12.7,149.86 12.7,147.32 E$11.AOUT
S$12  (via drill 0.6)
  Top 1.93: 10.16,129.54 E$104.IN2 v17.78,129.54
S$13
  Top 1.93: E$73.CPLUS E$102.IN1 E$84.IN2
S$14
  Top 1.93: E$3.P$3 E$31.IN2 E$32.IN2
S$15
  Top 1.93: 30.48,144.78 22.86,144.78 22.86,170.18 E$59.IN2
S$16
  Top 1.93: 25.4,147.32 33.02,147.32
S$17
  Top 1.93: E$36.P$1 E$35.IN1 15.24,167.64 E$34.P$2
S$18
  Top 1.93: E$11.DOUT E$52.IN2 33.02,129.54
S$19
  Top 1.93: E$75.IN1 E$36.P$2
S$20
  Top 1.93: E$43.P$1 12.7,157.48 E$40.IN2 12.7,162.56 E$37.IN1
S$21
  Top 1.93: E$4.RESET 25.4,17.78 25.4,15.24 33.02,15.24 E$7.P$1 E$151.P$1 E$8.P$1
S$22
  Top 1.93: 33.02,134.62 E$52.IN1 | E$11.DMINUS 33.02,134.62 | 33.02,134.62 E$105.IN2
S$23
  Top 1.93: E$45.P$1 E$44.IN1 17.78,160.02 E$43.P$2
S$24  (via drill 0.6)
  Top 1.93: E$45.P$2 v20.32,154.94 E$46.IN1
S$25
  Top 1.93: E$1.2!S 38.1,33.02 38.1,22.86 E$13.P$1 E$12.P$1
S$26
  Top 1.93: E$156.CPLUS E$159.IN1 E$49.IN2
S$27
  Top 1.93: E$50.IN1 E$156.CMINUS 78.74,144.78 78.74,152.4 76.2,152.4 76.2,170.18 E$173.IN2
S$28
  Top 1.93: E$56.IN1 E$55.P$2
S$29  (via drill 0.6)
  Top 1.93: E$77.P$1 v45.72,187.96 E$74.P$1 45.72,182.88 E$168.IN2
S$30
  Top 1.93: 35.56,35.56 38.1,35.56 | 38.1,35.56 E$1.2!R | 35.56,35.56 E$14.P$1 | 35.56,27.94 35.56,35.56 | 38.1,35.56 E$152.P$1
S$31
  Top 1.93: E$18.P$3 E$60.IN2 E$61.IN2
S$32
  Top 1.93: E$62.IN2 35.56,177.8 E$61.IN1 35.56,172.72 E$63.P$1
S$33
  Top 1.93: E$65.P$1 E$64.IN1 33.02,167.64 E$63.P$2
S$34
  Top 1.93: E$67.P$1 30.48,157.48 E$66.IN2 30.48,162.56 E$72.IN1
S$35
  Top 1.93: E$69.P$1 E$68.IN1 35.56,160.02 E$67.P$2
S$36  (via drill 0.6)
  Top 1.93: E$69.P$2 v38.1,154.94 E$70.IN1
S$37
  Top 1.93: E$71.IN1 E$65.P$2
S$38
  Top 1.93: E$56.IN2 E$57.IN1 27.94,180.34 E$58.IN2 E$59.IN1
S$39
  Top 1.93: E$78.IN1 E$77.P$2
S$40
  Top 1.93: E$81.IN2 40.64,170.18 40.64,139.7 48.26,139.7 48.26,144.78 E$73.AMINUS
S$41
  Top 1.93: E$21.IN2 27.94,142.24 E$11.CPLUS
S$42
  Top 1.93: 45.72,147.32 E$73.AOUT
S$43
  Top 1.93: E$73.BOUT E$53.IN1 48.26,129.54
S$44
  Top 1.93: E$73.BMINUS 40.64,134.62 E$53.IN2 40.64,127 E$100.IN1
S$45
  Top 1.93: E$83.IN2 50.8,142.24 E$73.APLUS
S$46
  Top 1.93: E$11.DPLUS 30.48,137.16 30.48,142.24 E$54.P$2
S$47
  Top 1.93: E$74.P$3 E$89.IN2 E$90.IN2
S$48
  Top 1.93: E$91.IN2 53.34,177.8 E$90.IN1 53.34,172.72 E$92.P$1
S$49
  Top 1.93: E$94.P$1 E$93.IN1 50.8,167.64 E$92.P$2
S$50
  Top 1.93: E$96.P$1 48.26,157.48 E$95.IN2 48.26,162.56 E$109.IN1
S$51
  Top 1.93: E$98.P$1 E$97.IN1 53.34,160.02 E$96.P$2
S$52  (via drill 0.6)
  Top 1.93: E$98.P$2 v55.88,154.94 E$99.IN1
S$53
  Top 1.93: E$108.IN1 E$94.P$2
S$54
  Top 1.93: E$78.IN2 E$79.IN1 45.72,180.34 E$80.IN2 E$81.IN1
S$55
  Top 1.93: 60.96,147.32 E$87.P$3
S$56  (via drill 0.6)
  Top 1.93: v10.16,142.24 E$19.P$3 | v10.16,137.16 E$11.BPLUS
  Bottom 1.93: v10.16,137.16 v10.16,142.24
S$57  (via drill 0.6)
  Top 1.93: v43.18,142.24 E$86.P$3 | E$73.BPLUS v43.18,137.16 E$106.IN1
  Bottom 1.93: v43.18,137.16 v43.18,142.24
S$58  (via drill 0.6)
  Top 1.93: v25.4,129.54 E$101.IN2
S$59
  Top 1.93: E$73.DPLUS 66.04,137.16 66.04,142.24 E$87.P$2 E$158.IN1
S$60
  Top 1.93: 66.04,144.78 58.42,144.78 58.42,170.18 E$116.IN2
S$61  (via drill 0.6)
  Top 1.93: v38.1,127 E$106.IN2
S$62  (via drill 0.6)
  Top 1.93: E$112.P$1 v63.5,187.96 E$110.P$1 63.5,182.88 E$191.IN2
S$63
  Top 1.93: E$113.IN1 E$112.P$2
S$64
  Top 1.93: E$110.P$3 E$117.IN2 E$118.IN2
S$65
  Top 1.93: E$119.IN2 71.12,177.8 E$118.IN1 71.12,172.72 E$120.P$1
S$66
  Top 1.93: E$122.P$1 E$121.IN1 68.58,167.64 E$120.P$2
S$67
  Top 1.93: E$124.P$1 66.04,157.48 E$123.IN2 66.04,162.56 E$129.IN1
S$68
  Top 1.93: E$126.P$1 E$125.IN1 71.12,160.02 E$124.P$2
S$69  (via drill 0.6)
  Top 1.93: E$126.P$2 v73.66,154.94 E$127.IN1
S$70
  Top 1.93: E$128.IN1 E$122.P$2
S$71
  Top 1.93: E$113.IN2 E$114.IN1 63.5,180.34 E$115.IN2 E$116.IN1
S$72
  Top 1.93: E$1.4!R 50.8,43.18 50.8,50.8 E$143.P$1 E$144.P$1
S$73
  Top 1.93: E$24.P$1 E$1.4Q
S$74
  Top 1.93: E$17.P$1 E$1.NC
S$75  (via drill 0.6)
  Top 1.93: E$26.P$2 12.7,45.72 12.7,40.64 5.08,40.64 5.08,20.32 v10.16,20.32 E$4.Q3
S$76
  Top 1.93: 81.28,43.18 E$134.P$2 | 81.28,43.18 E$137.P$2 | 81.28,43.18 E$39.P$2 E$27.Q9
S$77
  Top 1.93: E$27.Q8 E$28.P$2 | 78.74,40.64 E$131.P$2 E$28.P$2 | E$28.P$2 E$136.P$2
S$78
  Top 1.93: E$39.P$1 83.82,35.56 83.82,55.88 E$145.IN2 E$42.P$1 | E$39.P$1 76.2,35.56 E$28.P$1 E$41.P$1 | E$39.P$1 E$27.RESET
S$79
  Top 1.93: E$1.3!R 63.5,38.1
S$80
  Top 1.93: E$17.P$2 E$24.P$2 E$130.IN1 E$51.IN1 E$148.IN1
S$81  (via drill 0.6)
  Top 1.93: E$27.CLOCK 73.66,33.02 73.66,25.4 78.74,25.4 78.74,27.94 86.36,27.94 v86.36,55.88 v86.36,58.42 58.42,58.42 58.42,60.96 v45.72,60.96 v43.18,60.96 v40.64,60.96 40.64,58.42 15.24,58.42
S$82
  Top 1.93: 15.24,55.88 E$51.IN2
S$83
  Top 1.93: 55.88,58.42 43.18,58.42 43.18,55.88 E$130.IN2
S$84
  Top 1.93: 82.55,30.48 E$134.P$1 E$131.P$1 78.74,31.75 | 82.55,30.48 E$139.IN1 83.82,33.02 78.74,33.02 78.74,31.75 | 78.74,31.75 82.55,31.75 82.55,30.48
S$85  (via drill 0.6)
  Top 1.93: E$136.P$1 v78.74,48.26 | v78.74,48.26 E$138.IN1 v78.74,53.34 80.01,53.34 | v78.74,48.26 81.28,48.26 E$137.P$1 80.01,53.34 | 80.01,53.34 80.01,49.53
S$86
  Top 1.93: E$135.P$2 66.04,10.16 78.74,10.16 E$132.C2 E$132.C3 81.28,5.08 86.36,5.08 86.36,20.32 73.66,20.32 E$132.C4 E$132.C1
S$87  (via drill 0.6)
  Top 1.93: E$139.IN2 88.9,22.86 88.9,2.54 63.5,2.54 | 22.86,27.94 E$4.Q10 | v22.86,25.4 22.86,27.94 | v22.86,2.54 63.5,2.54 | 63.5,2.54 E$135.P$1 | v22.86,25.4 24.13,25.4 24.13,26.67 | v22.86,25.4 E$151.P$2 E$150.P$2 22.86,27.94 | 22.86,27.94 E$153.P$2
  Bottom 1.93: v22.86,2.54 v22.86,25.4
S$88  (via drill 0.6)
  Top 1.93: E$4.Q11 v12.7,33.02
S$89
  Top 1.93: 81.28,147.32 88.9,147.32
S$90
  Top 1.93: E$156.DPLUS 88.9,137.16 E$88.P$2 E$162.IN1
S$91
  Top 1.93: E$73.DMINUS E$107.IN2 E$157.IN2
S$92
  Top 1.93: E$73.DOUT 68.58,132.08 E$157.IN1 71.12,127 E$251.IN2
S$93  (via drill 0.6)
  Top 1.93: v91.44,132.08 91.44,134.62
S$94
  Top 1.93: E$156.AMINUS E$156.AOUT
S$95  (via drill 0.6)
  Top 1.93: E$156.BMINUS E$156.BOUT v73.66,129.54 v73.66,127
S$96  (via drill 0.6)
  Top 1.93: E$169.P$1 v81.28,187.96 E$167.P$1 81.28,182.88 E$318.IN2
S$97
  Top 1.93: E$170.IN1 E$169.P$2
S$98
  Top 1.93: E$167.P$3 E$174.IN2 E$175.IN2
S$99
  Top 1.93: E$176.IN2 88.9,177.8 E$175.IN1 88.9,172.72 E$177.P$1
S$100
  Top 1.93: E$179.P$1 E$178.IN1 86.36,167.64 E$177.P$2
S$101
  Top 1.93: E$181.P$1 83.82,157.48 E$180.IN2 83.82,162.56 E$186.IN1
S$102
  Top 1.93: E$183.P$1 E$182.IN1 88.9,160.02 E$181.P$2
S$103  (via drill 0.6)
  Top 1.93: E$183.P$2 v91.44,154.94 E$184.IN1
S$104
  Top 1.93: E$185.IN1 E$179.P$2
S$105
  Top 1.93: E$170.IN2 E$171.IN1 81.28,180.34 E$172.IN2 E$173.IN1
S$106
  Top 1.93: E$27.Q10 78.74,45.72
S$107
  Top 1.93: E$156.DMINUS E$161.IN2 E$160.IN2
S$108  (via drill 0.6)
  Top 1.93: E$156.DOUT 88.9,132.08 88.9,129.54 | 88.9,129.54 E$160.IN1 | 88.9,129.54 E$252.IN2
  other vias: 88.9,127
S$109
  Top 1.93: E$27.Q7 73.66,40.64
S$110  (via drill 0.6)
  Top 1.93: v68.58,5.08 E$132.A1 68.58,6.35
S$111  (via drill 0.6)
  Top 1.93: E$132.A3 v81.28,17.78
S$112  (via drill 0.6)
  Top 1.93: E$132.B3 v83.82,17.78
S$113  (via drill 0.6)
  Top 1.93: v71.12,5.08 E$132.B1
S$114  (via drill 0.6)
  Top 1.93: v73.66,5.08 E$132.A2
S$115  (via drill 0.6)
  Top 1.93: v76.2,5.08 E$132.B2
S$116
  Top 1.93: 76.2,5.08 78.74,5.08
S$117  (via drill 0.6)
  Top 1.93: 25.4,30.48 E$8.P$2 15.24,33.02 15.24,22.86 E$4.Q6 v10.16,22.86
S$118
  Top 1.93: E$4.Q7 E$13.P$2 27.94,38.1 20.32,38.1 20.32,50.8 E$143.P$2
S$119  (via drill 0.6)
  Top 1.93: 17.78,35.56 10.16,35.56 v10.16,27.94 E$4.Q5 | 17.78,35.56 E$14.P$2 | 17.78,35.56 17.78,53.34 E$144.P$2
S$120  (via drill 0.6)
  Top 1.93: E$4.Q4 v10.16,25.4 7.62,25.4 7.62,38.1 15.24,38.1 E$25.P$2
S$121
  Top 1.93: 30.48,19.05 29.21,19.05 | 30.48,19.05 30.48,17.78 E$12.P$2 27.94,20.32 E$7.P$2 | 30.48,20.32 30.48,40.64 E$1.1!R | 30.48,20.32 30.48,19.05 | E$7.P$2 30.48,20.32 | E$4.Q8 E$7.P$2
S$122
  Top 1.93: E$154.P$2 71.12,27.94 E$41.P$2 66.04,27.94 66.04,33.02 E$27.Q1
S$123
  Top 1.93: E$165.IN1 68.58,22.86 55.88,22.86 E$155.P$2
S$124
  Top 1.93: 22.86,43.18 E$1.1!S 45.72,43.18 45.72,45.72 E$1.4!S | 22.86,43.18 E$26.P$1 | 22.86,40.64 22.86,43.18
S$125
  Top 1.93: E$195.IN1 E$27.Q2
S$126
  Top 1.93: E$42.P$2 66.04,53.34 66.04,45.72 E$27.Q5 58.42,45.72 E$197.IN1
S$127
  Top 1.93: E$196.IN1 60.96,43.18 E$27.Q4
S$128
  Top 1.93: E$196.IN2 E$197.IN2 58.42,30.48 | 58.42,27.94 58.42,30.48 | 58.42,27.94 E$155.P$1 | E$195.IN2 58.42,27.94 | 58.42,30.48 E$194.IN2
S$129  (via drill 0.6)
  Top 1.93: E$199.C4 E$199.C1 v38.1,83.82
S$131  (via drill 0.6)
  other vias: 60.96,53.34
S$132  (via drill 0.6)
  other vias: 60.96,50.8
S$133  (via drill 0.6)
  other vias: 60.96,48.26
S$134
  Top 1.93: 48.26,25.4 E$193.P$1 48.26,20.32 71.12,20.32 71.12,22.86 81.28,22.86 E$154.P$1 88.9,25.4 E$133.P$1 E$142.P$1 | 48.26,25.4 45.72,25.4 45.72,35.56 E$1.3!S | 48.26,25.4 E$198.IN2
S$135
  Top 1.93: E$199.A4 33.02,83.82 22.86,83.82 22.86,86.36 5.08,86.36 E$200.IN2
S$136
  Top 1.93: E$201.AMINUS E$201.AOUT 38.1,99.06 38.1,93.98
S$137
  Top 1.93: E$202.IN2 43.18,96.52 40.64,96.52 40.64,93.98
S$138
  Top 1.93: E$201.BPLUS 43.18,109.22 E$203.IN1
S$139  (via drill 0.6)
  Top 1.93: E$201.BMINUS E$201.BOUT v45.72,114.3 v45.72,111.76 v45.72,109.22
S$140  (via drill 0.6)
  Top 1.93: E$204.C2 E$204.C3 v48.26,101.6
S$141  (via drill 0.6)
  Top 1.93: E$204.C4 E$204.C1 v58.42,81.28
S$142
  Top 1.93: E$205.AMINUS E$205.AOUT 48.26,81.28 E$204.A3
S$143
  Top 1.93: E$205.CMINUS E$205.COUT 50.8,81.28 E$204.B4
S$144
  Top 1.93: E$207.IN2 43.18,83.82 45.72,83.82 E$204.B3
S$145
  Top 1.93: E$204.A4 53.34,83.82 55.88,83.82 E$206.IN2
S$146
  Top 1.93: E$206.IN1 E$205.DPLUS E$208.IN1
S$147
  Top 1.93: 43.18,71.12 E$205.BPLUS E$209.IN1
S$148
  Top 1.93: E$210.AMINUS E$210.AOUT 58.42,99.06 58.42,93.98
S$149
  Top 1.93: E$210.CMINUS E$210.COUT 55.88,99.06 55.88,93.98
S$150
  Top 1.93: E$212.IN2 63.5,96.52 60.96,96.52 60.96,93.98
S$151
  Top 1.93: 53.34,93.98 53.34,96.52 50.8,96.52 E$211.IN2
S$152
  Top 1.93: E$213.IN1 E$211.IN1 E$210.DPLUS
S$153  (via drill 0.6)
  Top 1.93: E$210.DMINUS E$210.DOUT v48.26,114.3 v48.26,111.76 v48.26,109.22 v48.26,106.68
S$154
  Top 1.93: E$214.IN1 63.5,109.22 E$210.BPLUS
S$155  (via drill 0.6)
  Top 1.93: E$210.BMINUS E$210.BOUT v66.04,114.3 v66.04,111.76 v66.04,109.22
S$156  (via drill 0.6)
  Top 1.93: E$215.C2 E$215.C3 v68.58,101.6
S$157  (via drill 0.6)
  Top 1.93: E$215.C4 E$215.C1 v78.74,81.28
S$158
  Top 1.93: E$216.AMINUS E$216.AOUT 68.58,81.28 E$215.A3
S$159
  Top 1.93: E$216.CMINUS E$216.COUT 71.12,81.28 E$215.B4
S$160
  Top 1.93: E$218.IN2 63.5,83.82 66.04,83.82 E$215.B3
S$161
  Top 1.93: E$215.A4 73.66,83.82 76.2,83.82 E$217.IN2
S$162
  Top 1.93: E$216.DPLUS E$217.IN1 E$219.IN1
S$163
  Top 1.93: 63.5,71.12 E$216.BPLUS E$220.IN1
S$164
  Top 1.93: E$221.AMINUS E$221.AOUT 78.74,99.06 78.74,93.98
S$165
  Top 1.93: E$221.CMINUS E$221.COUT 76.2,99.06 76.2,93.98
S$166
  Top 1.93: E$223.IN2 83.82,96.52 81.28,96.52 81.28,93.98
S$167
  Top 1.93: 73.66,93.98 73.66,96.52 71.12,96.52 E$222.IN2
S$168
  Top 1.93: E$221.DPLUS E$222.IN1 E$224.IN1
S$169  (via drill 0.6)
  Top 1.93: E$221.DMINUS E$221.DOUT v68.58,114.3 v68.58,111.76 v68.58,109.22 v68.58,106.68
S$170
  Top 1.93: E$225.IN1 83.82,109.22 E$221.BPLUS
S$171  (via drill 0.6)
  Top 1.93: E$221.BMINUS E$221.BOUT v86.36,114.3 | v86.36,114.3 v86.36,111.76 v86.36,109.22 | v86.36,114.3 v86.36,116.84
S$172  (via drill 0.6)
  Top 1.93: E$205.BOUT E$205.BMINUS v43.18,68.58 v43.18,66.04 E$205.BOUT
S$173  (via drill 0.6)
  Top 1.93: E$216.BOUT E$216.BMINUS v63.5,68.58 v63.5,66.04 E$216.BOUT
S$174  (via drill 0.6)
  Top 1.93: E$205.DOUT E$205.DMINUS v55.88,68.58 v55.88,66.04 E$205.DOUT
S$175  (via drill 0.6)
  Top 1.93: E$216.DOUT E$216.DMINUS v76.2,68.58 v76.2,66.04 E$216.DOUT
S$176  (via drill 0.6)
  Top 1.93: E$201.DMINUS E$201.DOUT v33.02,116.84 v30.48,116.84 v27.94,116.84
S$177
  Top 1.93: E$201.DPLUS 30.48,109.22 30.48,114.3 25.4,114.3 25.4,116.84 | E$200.IN1 25.4,116.84 | 25.4,116.84 25.4,119.38 E$232.IN2
S$178
  Top 1.93: E$201.COUT E$201.CMINUS 25.4,101.6 25.4,109.22 7.62,109.22 7.62,88.9 30.48,88.9 E$199.B4
S$179
  Top 1.93: E$233.P$1 E$236.IN1 E$235.IN1
S$180
  Top 1.93: E$234.P$2 E$233.P$2 | E$233.P$2 33.02,73.66 | E$216.CPLUS E$216.APLUS E$205.CPLUS E$205.APLUS 40.64,76.2 40.64,78.74 35.56,78.74 | 35.56,78.74 17.78,78.74 17.78,83.82 2.54,83.82 2.54,111.76 27.94,111.76 27.94,104.14 E$201.CPLUS | E$233.P$2 35.56,78.74
S$181
  Top 1.93: E$234.P$1 E$239.IN1 E$238.IN1
S$182
  Top 1.93: E$235.IN2 17.78,66.04 E$237.IN1 27.94,66.04 27.94,68.58 E$233.P$3
S$183  (via drill 0.6)  (1 unrouted)
  Top 1.93: v12.7,104.14 E$245.IN2 | v50.8,27.94 v50.8,30.48 E$1.2Q v48.26,27.94 v50.8,27.94
S$185
  Top 1.93: E$240.P$1 E$242.IN1 20.32,99.06 E$243.IN1
S$186
  Top 1.93: E$241.P$2 E$240.P$2 30.48,99.06 30.48,96.52 35.56,96.52 35.56,104.14 E$201.APLUS E$210.APLUS | E$221.APLUS E$221.CPLUS E$210.APLUS | E$210.APLUS E$210.CPLUS
S$187
  Top 1.93: E$241.P$1 E$245.IN1 20.32,101.6 E$246.IN1
S$188
  Top 1.93: E$240.P$3 15.24,93.98 15.24,96.52 E$242.IN2
S$189  (via drill 0.6)
  Top 1.93: v50.8,35.56 v50.8,33.02 E$1.3Q
S$190  (via drill 0.6)
  Top 1.93: E$132.B4 v78.74,17.78
S$191  (via drill 0.6)
  Top 1.93: E$132.A4 v76.2,17.78
S$192  (via drill 0.6)
  Top 1.93: E$252.IN1 v81.28,121.92 v78.74,121.92 E$251.IN1 E$250.IN1 E$249.IN1 v20.32,121.92 v17.78,121.92 v15.24,121.92 E$38.IN1
S$193  (via drill 0.6)
  Top 1.93: v71.12,132.08 E$158.IN2
S$194  (via drill 0.6)
  Top 1.93: E$156.BPLUS v68.58,137.16 v68.58,139.7
S$195
  Top 1.93: E$263.IN2 81.28,60.96
S$197  (via drill 0.6)
  other vias: 93.98,193.04
S$198  (via drill 0.6)
  other vias: 2.54,2.54
S$199  (via drill 0.6)
  other vias: 2.54,193.04
S$200  (via drill 0.6)
  other vias: 93.98,2.54
S$201  (via drill 0.6)
  other vias: 20.32,10.16
S$203  (via drill 0.6)
  Top 1.93: v10.16,17.78 E$4.Q2
S$204  (via drill 0.6)
  Top 1.93: v10.16,15.24 E$4.Q1
S$205  (via drill 0.6)
  Top 1.93: E$27.Q11 v63.5,50.8
S$207  (via drill 0.6)
  Top 1.93: v12.7,66.04 7.62,66.04 E$238.IN2
VCC  (via drill 0.6)
  Top 1.93: E$132.VCC 66.04,15.24 | E$132.VCC E$165.IN2 | E$4.VCC 17.78,30.48 17.78,7.62 v40.64,7.62 | E$132.VCC 55.88,15.24 E$6.VCC 55.88,7.62 v45.72,7.62 | 74.93,52.07 74.93,53.34 E$263.IN1 | E$263.IN1 E$140.IN1 76.2,50.8 73.66,50.8 | v45.72,7.62 45.72,8.89 | 73.66,50.8 E$263.IN1 | 73.66,50.8 E$138.IN2 E$27.VCC 68.58,48.26 68.58,55.88 v60.96,55.88 60.96,48.26 55.88,48.26 | v45.72,7.62 45.72,20.32 43.18,20.32 43.18,38.1 | 43.18,38.1 E$1.OE | 43.18,38.1 43.18,40.64 E$1.1Q 55.88,40.64 55.88,48.26 | 55.88,48.26 v55.88,55.88 v45.72,55.88 45.72,48.26 E$1.VCC | E$237.IN2 v33.02,66.04 v38.1,66.04 38.1,73.66 v40.64,73.66 E$205.VCC | 20.32,83.82 20.32,81.28 v40.64,81.28 E$199.VCC 40.64,88.9 43.18,88.9 | v60.96,73.66 E$216.VCC | E$229.IN2 v60.96,78.74 E$204.VCC 60.96,88.9 | 43.18,88.9 E$227.IN1 | 60.96,88.9 43.18,88.9 | 63.5,88.9 E$226.IN1 | 63.5,88.9 60.96,88.9 | 81.28,88.9 E$215.VCC | 81.28,88.9 63.5,88.9 | 83.82,88.9 E$228.IN1 | 83.82,88.9 81.28,88.9 | v86.36,88.9 83.82,88.9 | v86.36,93.98 86.36,106.68 E$221.VCC 78.74,106.68 v78.74,116.84 | E$156.VCC 76.2,139.7 76.2,124.46 | E$49.IN1 v83.82,124.46 76.2,124.46 | E$231.IN1 E$210.VCC 58.42,106.68 v58.42,116.84 v68.58,116.84 v73.66,116.84 | E$230.IN1 E$201.VCC 38.1,106.68 38.1,116.84 v40.64,116.84 v53.34,116.84 | 76.2,124.46 v68.58,124.46 E$84.IN1 55.88,124.46 | E$73.VCC 55.88,139.7 55.88,124.46 | 55.88,124.46 E$83.IN1 v40.64,124.46 E$21.IN1 20.32,124.46 | E$11.VCC 20.32,139.7 20.32,124.46 | 20.32,124.46 E$85.IN1 2.54,124.46 2.54,187.96 7.62,187.96 7.62,193.04 E$31.IN1 20.32,193.04 | E$36.P$3 E$44.IN2 E$46.IN2 E$35.IN2 20.32,193.04 | E$65.P$3 E$68.IN2 E$70.IN2 E$64.IN2 38.1,193.04
  Top 1.93: 20.32,193.04 E$60.IN1 38.1,193.04 | E$94.P$3 E$97.IN2 E$99.IN2 E$93.IN2 55.88,193.04 | 38.1,193.04 E$89.IN1 55.88,193.04 | E$122.P$3 E$125.IN2 E$127.IN2 E$121.IN2 73.66,193.04 | 55.88,193.04 E$117.IN1 73.66,193.04 | 73.66,193.04 E$174.IN1 88.9,187.96 91.44,187.96 E$178.IN2 E$184.IN2 E$182.IN2 E$179.P$3
  Bottom 1.93: v45.72,7.62 v40.64,7.62 | v40.64,81.28 v40.64,73.66 | v60.96,78.74 v60.96,73.66 | v86.36,93.98 v86.36,88.9 | v73.66,116.84 v78.74,116.84 | v68.58,124.46 v68.58,116.84 | v53.34,116.84 v58.42,116.84 | v40.64,124.46 v40.64,116.84 | v33.02,66.04 v45.72,55.88

## Text on the board
Unrouted: X | X | A | B | B | B | B | B | vst | hst | A | A | A | A | HSYNC | VST | PROBLEM | x | GOOD | VSYNC | HPTRIG
tPlace: 3906 | 3906 | 3906 | 3906 | 3906 | 3904 | 3906 | 3906 | 3906 | 3906 | 3906 | 3904 | 3904 | 3904 | 3904 | 3904 | 3904 | 3904 | 3904 | 3904 | 3904 | 3904 | 3904 | 3904 | 3904 | 3904 | 3906 | 3906 | 3904 | 3906 | 3904 | 2k | 3904
tValues: mpf102 | mpf102 | mpf102 | mpf102 | mpf102